# Altium PCB Magnetic-Encoder-V01.PcbDoc
Units mm, origin at the board's own origin, x right, y up, seen from the top; angles counter-clockwise.
Board outline 42.3 x 42.3 mm, 2 copper layers (Top Layer, Bottom Layer); 57 components, 48 nets, 213 pads, 0 vias.
Unrouted connection lines stored in the file: 137.
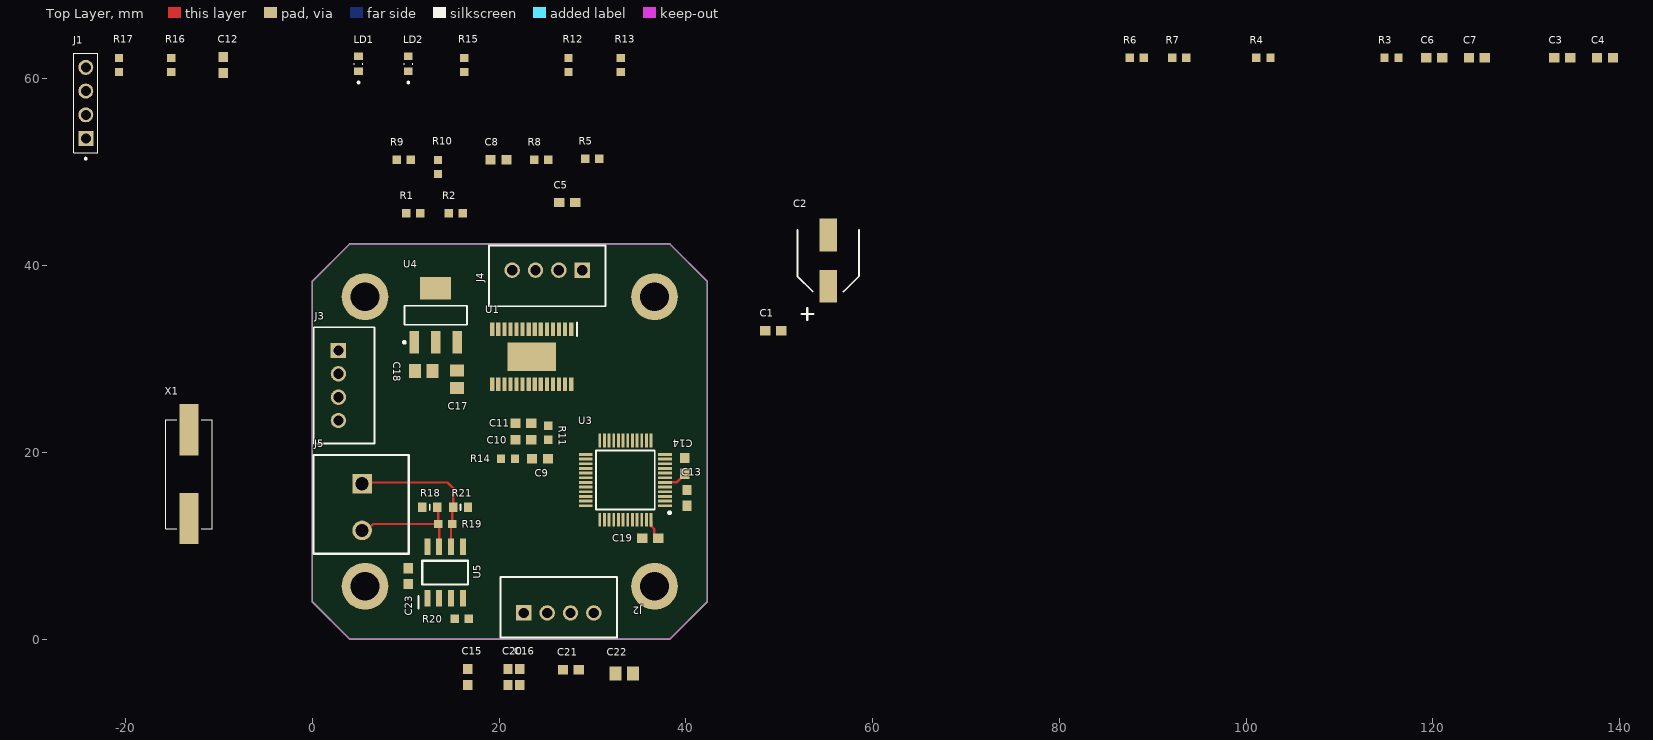
[diagram p0: Top Layer view]
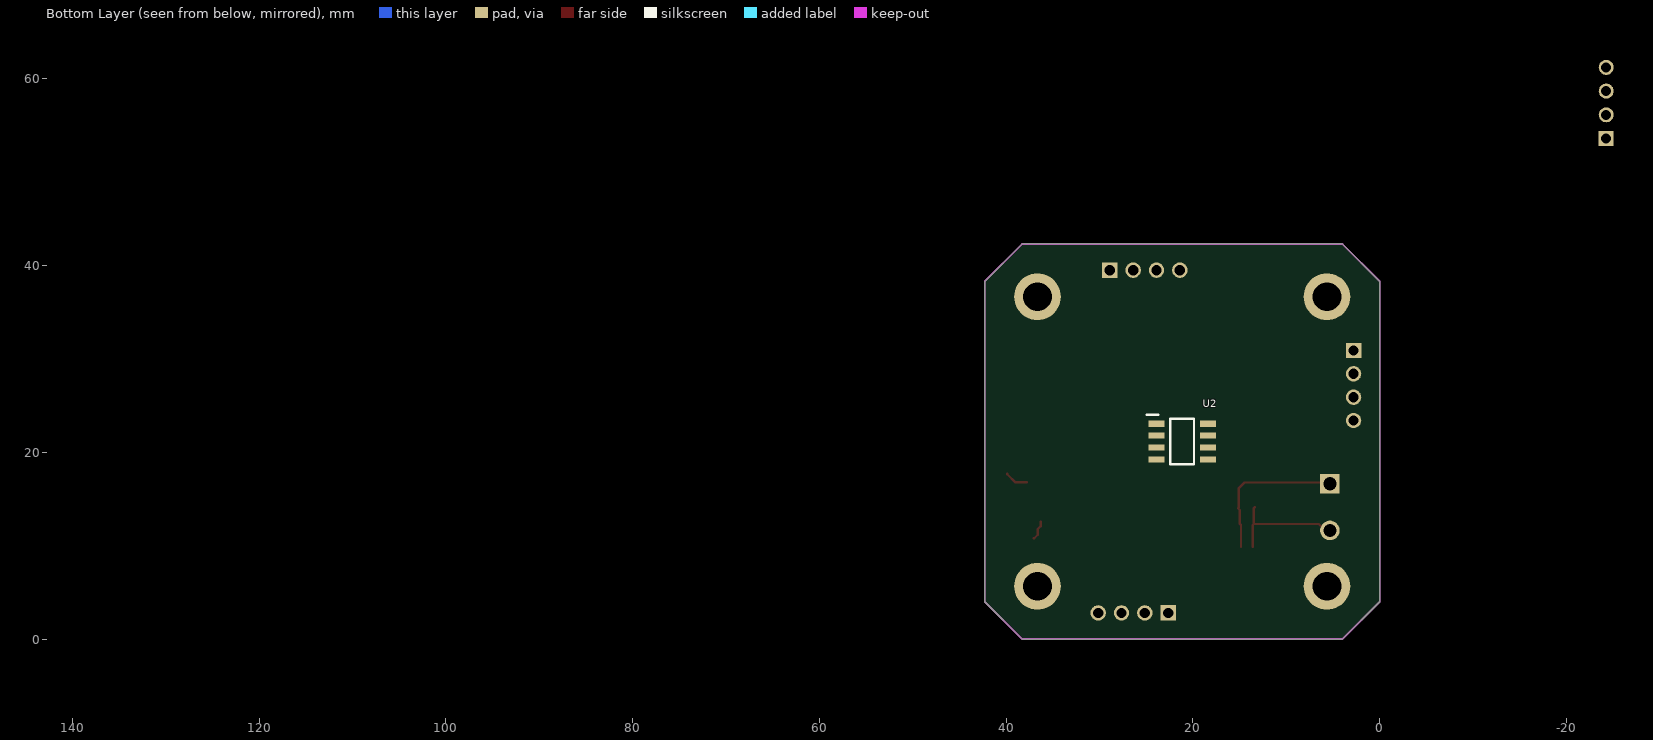
[diagram p1: Bottom Layer view, seen from below]

## Layer stack, top to bottom
Top Solder: solder mask 0.0102, Solder Resist, Dk 3.5
Top Layer: signal copper 0.0356
Dielectric 1: dielectric 0.32, FR-4, Dk 4.8
Bottom Layer: signal copper 0.0356
Bottom Solder: solder mask 0.0102, Solder Resist, Dk 3.5

## Board outline
0,4 0,38.3 4,42.3 38.3,42.3 42.3,38.3 42.3,4 38.3,0 4,0

## Design rules (kind name [scope] priority, off if disabled: settings)
Clearance [All] p1: gap=0.254 ignorepadtopadclearanceinfootprint=TRUE
PolygonConnect [All] p1: connectstyle=Relief reliefconductorwidth=0.254 reliefentries=4 polygonreliefangle="90 Angle" airgapwidth=0.254
RoutingVias [All] p1: holewidth=0.711 width=1.27 viastyle="Through Hole" minholewidth=0.711 minwidth=1.27 maxholewidth=0.711 maxwidth=1.27
SolderMaskExpansion [All] p1: expansion=0.102 istentingtop=FALSE
SupplyNets "Schematic Supply Nets_2" [InNet('GND')] p1: voltage=0.000
SupplyNets "Schematic Supply Nets_1" [InNet('+3.3')] p2: voltage=0.000
SupplyNets "Schematic Supply Nets" [InNet('+VM')] p3: voltage=0.000
Width [All] p1: maxlimit=0.254 minlimit=0.254 preferedwidth=0.254
30 further rules are at their usual default settings.

## Components (designator, comment, footprint, x,y, rotation, side; value= is the part's Value field where it differs from the comment)
C1 "Capacitor" Cap-0603 49.364,33.02 r180 top value=10nF
C2 "Capacitor" MRW-025V101ME077-T/R 55.245,40.513 r90 top value=100uF
C3 "Capacitor" Cap-0603 133.858,62.23 r0 top value=100nF
C4 "Capacitor" Cap-0603 138.43,62.23 r0 top value=100nF
C5 "Capacitor" Cap-0603 27.305,46.736 r0 top value=100nF
C6 "Capacitor" Cap-0603 120.142,62.23 r0 top value=10nF
C7 "Capacitor" Cap-0603 124.714,62.23 r0 top value=10nF
C8 "Capacitor" Cap-0603 19.939,51.308 r0 top value=470nF
C9 "Capacitor" Cap-0603 24.384,19.304 r0 top value=100nF
C10 "Capacitor" Cap-0603 22.606,21.336 r0 top value=1uF
C11 "Capacitor" Cap-0603 22.606,23.114 r0 top value=100nF
C12 "Capacitor" Cap-0603 -9.525,61.468 r90 top value=100nF
C13 "Capacitor" Cap-0603 40.132,15.113 r270 top value=20pF
C14 "Capacitor" Cap-0603 39.878,18.542 r90 top value=20pF
C15 "Capacitor" Cap-0603 16.637,-4.064 r90 top value=10nF
C16 "Capacitor" Cap-0603 22.225,-4.064 r90 top value=1uF
C17 "Capacitor" Cap-0805 15.494,27.813 r270 top value=10uF
C18 "Capacitor" Cap-0805 11.938,28.702 r180 top value=10uF
C19 "Capacitor" Cap-0603 36.195,10.795 r0 top value=100nF
C20 "Capacitor" Cap-0603 20.955,-4.064 r90 top value=100nF
C21 "Capacitor" Cap-0603 27.686,-3.302 r0 top value=100nF
C22 "Capacitor" Cap-0805 33.401,-3.683 r0 top value=4.7uF
C23 "Capacitor" Cap-0603 10.287,6.731 r270 top value=100nF
J1 "Header" Header(M)_4PIN_2.54MM -24.257,57.404 r90 top
J2 "Connector" Connector_4_PIN_2.5MM 26.396,2.794 r0 top
J3 "Connector" Connector_4_PIN_2.5MM 2.8,27.15 r270 top
J4 "Connector" Connector_4_PIN_2.5MM 25.15,39.5 r180 top
J5 "Klemens" DG1285002P14 5.334,16.629 r270 top
LD1 "LED" LED_0603 4.953,61.595 r90 top
LD2 "LED" LED_0603 10.287,61.595 r90 top
R1 "Resistor" RES-0603 10.795,45.593 r0 top value=0R
R2 "Resistor" RES-0603 15.367,45.593 r0 top value=0R
R3 "Resistor" RES-0603 115.57,62.23 r0 top value=10K
R4 "Resistor" RES-0603 101.854,62.23 r0 top value=10K
R5 "Resistor" RES-0603 29.972,51.435 r0 top value=47K
R6 "Resistor" RES-0603 88.265,62.23 r0 top value=10K
R7 "Resistor" RES-0603 92.837,62.23 r0 top value=10K
R8 "Resistor" RES-0603 24.511,51.308 r0 top value=47K
R9 "Resistor" RES-0603 9.779,51.308 r0 top value=0.2R
R10 "Resistor" RES-0603 13.462,50.546 r90 top value=0.2R
R11 "Resistor" RES-0603 25.273,22.098 r270 top value=0R
R12 "Resistor" RES-0603 27.432,61.468 r90 top value=330R
R13 "Resistor" RES-0603 33.02,61.468 r90 top value=330R
R14 "Resistor" RES-0603 20.955,19.304 r180 top value=0R
R15 "Resistor" RES-0603 16.256,61.468 r90 top value=10K
R16 "Resistor" RES-0603 -15.113,61.468 r90 top value=4.7K
R17 "Resistor" RES-0603 -20.701,61.468 r90 top value=4.7K
R18 "Resistor" Resistor_0603 12.573,14.097 r0 top value=1K
R19 "Resistor" RES-0603 14.224,12.319 r0 top value=120R
R20 "Resistor" RES-0603 16.002,2.159 r0 top value=10K
R21 "Resistor" Resistor_0603 15.875,14.097 r0 top value=1K
U1 "Motor Driver" HTSSOP-28 23.495,30.226 r270 top
U2 "Magnetic Encoder" "SOIC 8" 21.15,21.15 r180 bottom locked
U3 "Microcontroller" LQFP-48 33.528,17.018 r180 top
U4 "Voltage Regulator" SOT223-3 13.208,34.671 r0 top
U5 "Transceiver" "SOIC 8" 14.224,7.112 r90 top
X1 "Crystal" HC-49SD -13.208,17.653 r90 top

## Footprints (in the part's own frame and the unit in brackets; to place one, negate y for a bottom-side part, rotate by r counter-clockwise, add the part's x,y. Pads: shape width x height; smd on the part's side, far side on the other; paste and mask are expansions set on the pad)
Cap-0603 [mm]
  rect 1.1x1 smd: 1(-0.85,0) 2(0.85,0)
  body extent -0.8,-0.4 0.8,0.4, height 0.9
Cap-0805 [mm]
  rect 1.3x1.5 smd: 1(-0.95,0) 2(0.95,0)
  body extent -1,-0.62 1,0.63, height 0.78
Connector_4_PIN_2.5MM [mm]
  rect 1.65x1.65 / inner round 1.65 / far side rect 1.65x1.65 hole 1.1: 1(-3.75,0)
  round 1.65 hole 1.1: 2(-1.25,0) 3(1.25,0) 4(3.75,0)
  silkscreen extent -6.23,-2.64 6.23,3.86, body extent -6.23,-2.64 6.23,3.86, height 7.05
DG1285002P14 [mm]
  rect 2.1x2.1 hole 1.4: 1(0,0)
  round 2.1 hole 1.4: 2(5,0)
  silkscreen extent -3.07,-5.2 7.5,5, body extent -3.07,-5.2 7.5,5, height 14.1
HC-49SD [mm]
  rect 5.5x2 smd: 1(-4.75,0) 2(4.75,0)
  silkscreen extent -5.85,-2.5 5.85,2.5, body extent -6.75,-2.5 6.75,2.5, height 4.5
Header(M)_4PIN_2.54MM [mm]
  rect 1.605x1.605 / inner round 1.605 / far side rect 1.605x1.605 hole 1.07: 1(-3.81,0)
  round 1.605 hole 1.07: 2(-1.27,0) 3(1.27,0) 4(3.81,0)
  silkscreen extent -6.06,-1.27 5.33,1.27, body extent -5.08,-1.27 5.08,1.27, height 9.27
HTSSOP-28 [mm]
  rect 1.475x0.45 smd: 1(-2.938,4.225) 2(-2.938,3.575) 3(-2.938,2.925) 4(-2.938,2.275) 5(-2.938,1.625) 6(-2.938,0.975) 7(-2.938,0.325) 8(-2.938,-0.325) 9(-2.938,-0.975) 10(-2.938,-1.625) 11(-2.938,-2.275) 12(-2.938,-2.925) 13(-2.938,-3.575) 14(-2.938,-4.225) 15(2.938,-4.225) 16(2.938,-3.575) 17(2.938,-2.925) 18(2.938,-2.275) 19(2.938,-1.625) 20(2.938,-0.975) 21(2.938,-0.325) 22(2.938,0.325) 23(2.938,0.975) 24(2.938,1.625) 25(2.938,2.275) 26(2.938,2.925) 27(2.938,3.575) 28(2.938,4.225)
  rect 3.1x5.18 smd: 29(0,0)
  silkscreen extent -3.68,4.85 -2.2,4.85, body extent -3.2,-4.85 3.2,4.85, height 1.13
LED_0603 [mm]
  rect 0.81x0.93 smd: 1(0.81,0) 2(-0.81,0)
  silkscreen extent -2.1,-0.45 0.09,0.45, body extent -0.8,-0.4 0.8,0.4, height 0.8
LQFP-48 [mm]
  rect 1.475x0.3 smd: 1(-4.238,2.75) 2(-4.238,2.25) 3(-4.238,1.75) 4(-4.238,1.25) 5(-4.238,0.75) 6(-4.238,0.25) 7(-4.238,-0.25) 8(-4.238,-0.75) 9(-4.238,-1.25) 10(-4.238,-1.75) 11(-4.238,-2.25) 12(-4.238,-2.75) 25(4.238,-2.75) 26(4.238,-2.25) 27(4.238,-1.75) 28(4.238,-1.25) 29(4.238,-0.75) 30(4.238,-0.25) 31(4.238,0.25) 32(4.238,0.75) 33(4.238,1.25) 34(4.238,1.75) 35(4.238,2.25) 36(4.238,2.75)
  rect 0.3x1.475 smd: 13(-2.75,-4.238) 14(-2.25,-4.238) 15(-1.75,-4.238) 16(-1.25,-4.238) 17(-0.75,-4.238) 18(-0.25,-4.238) 19(0.25,-4.238) 20(0.75,-4.238) 21(1.25,-4.238) 22(1.75,-4.238) 23(2.25,-4.238) 24(2.75,-4.238) 37(2.75,4.238) 38(2.25,4.238) 39(1.75,4.238) 40(1.25,4.238) 41(0.75,4.238) 42(0.25,4.238) 43(-0.25,4.238) 44(-0.75,4.238) 45(-1.25,4.238) 46(-1.75,4.238) 47(-2.25,4.238) 48(-2.75,4.238)
  silkscreen extent -4.85,-3.15 3.15,3.62, body extent -4.5,-4.5 4.5,4.5, height 1.6
MRW-025V101ME077-T/R [mm]
  rect 3.5x1.85 smd: 1(-2.75,0) 2(2.75,0)
  silkscreen extent -6.35,-3.3 3.3,3.3, body extent -3.15,-3.15 3.15,3.15, height 7.7
RES-0603 [mm]
  rect 0.9x0.9 smd: 1(-0.75,0) 2(0.75,0)
  body extent -0.85,-0.4 0.85,0.4, height 0.56
Resistor_0603 [mm]
  rect 0.9x1 smd: 1(-0.8,0) 2(0.8,0)
  silkscreen extent 0,-0.31 0,0.31, body extent -0.8,-0.41 0.8,0.41, height 0.55
"SOIC 8" [mm]
  rect 1.75x0.65 smd: 1(-2.76,1.905) 2(-2.76,0.635) 3(-2.76,-0.635) 4(-2.76,-1.905) 5(2.76,-1.905) 6(2.76,-0.635) 7(2.76,0.635) 8(2.76,1.905)
  silkscreen extent -3.81,-2.45 1.27,2.85, body extent -3,-2.45 3,2.45, height 1.7
SOT223-3 [mm]
  rect 1x2.4 smd: 1(-2.3,-2.9) 2(0,-2.9) 3(2.3,-2.9)
  rect 3.3x2.4 smd: 4(0,2.9)
  silkscreen extent -3.47,-3.02 3.35,1.02, body extent -3.25,-3.5 3.25,3.5, height 1.8

## Part data
C1 C6 C7 C15: library part Capacitor_0603, "MLCC (1608) 0603 10nF 50VDC ±10% X7R", Part Number=CC0603KRX7R9BB103, Tolerance=%10, Voltage=50V
  C1 C15: Process=SMD
  C6 C7: Process=NM
C2: library part MRW-025V101ME077-T/R, "CAP.EL.100uF 25V 6.3x7.7 105C 2000Hrs SMD", Tolerance=%20, Voltage=25V, Part Number=MRW-025V101ME077-T/R, Process=SMD
C3 C4 C5 C9 C11 C12 C19 C20 C21 C23: library part Capacitor_0603, "MLCC (1608) 0603 100nF 50VDC ±10% X7R", Part Number=MCF03KTB500104, Tolerance=%10, Voltage=50V
  C3 C4 C5 C11 C12 C19 C20 C21 C23: Process=SMD
  C9: Process=NM
C8: library part Capacitor_0603, "MLCC (1608) 0603 470nF 25VDC ±10% X7R", Part Number=CL10B474KA8NNNC, Tolerance=%10, Voltage=25V, Process=SMD
C10 C16: library part Capacitor_0603, "MLCC (1608) 0603 1uF 25VDC ±10% X7R", Part Number=CL10B105KA8NNNC, Tolerance=%10, Voltage=25V, Process=SMD
C13 C14: library part Capacitor_0603, "MLCC (1608) 0603 20pF 50VDC ±5% C0G (NP0)", Part Number=CC0603JRNPO9BN200, Tolerance=%10, Voltage=50V, Process=SMD
C17 C18: library part Capacitor_0805, "MLCC (2012) 0805 10uF 25VDC ±10% X5R", Part Number=CL21A106KAYNNNE, Tolerance=%10, Voltage=25V, Process=SMD
C22: library part Capacitor_0805, "MLCC (2012) 0805 4.7uF 25VDC ±10% X5R", Part Number=CL21A475KAQNNNE, Tolerance=%10, Voltage=25V, Process=SMD
J1: library part Header(M)_4PIN_2.54MM, "Header 4-Pin Male 2.54mm Pitch", Process=THT
J2 J3 J4: library part 353120460, "Connector Header Through Hole 4 position 0.098\" (2.50mm)", Part Number=353120460, Process=SMD
J5: library part Klemens_2PIN_VIDA, "TERM.BLK.5.00MM 2P PCB TYPE 1 BOY GREEN", Part Number=DG128-5.0-02P-14-00AH, Process=THT
LD1 LD2: library part LED_0603, "LED - Discrete 0603 (1608 Metric)", Color=RED, Forward Voltage=2V, Part Number=LTST-C190KRKT, Process=NM
R1 R2 R11 R14: library part Resistor_0603, "RES.(1608) 0603 0 Ohms 5% 1/10W-S", Part Number=CRT03J7-R0R0, Power=1/10W, Tolerance=%5
  R1 R2 R14: Process=NM
  R11: Process=SMD
R3 R4 R6 R7 R15 R20: library part Resistor_0603, "RES.(1608) 0603 10K Ohms 5% 1/10W AUTOMOTIV", Part Number=CQ03SAJ0103T5E, Power=1/10W, Tolerance=%5
  R3: Process=NM
  R4 R6 R7 R15 R20: Process=SMD
R5 R8: library part Resistor_0603, "RES.(1608) 0603 47K Ohms 5% 1/10W-S", Part Number=0603SAJ0473TDE, Power=1/10W, Tolerance=%5, Process=SMD
R9 R10: library part Resistor_0603, "RES.(1608) 0603 200m Ohms 1% 1/5W", Part Number=CQ03SAJ0103T5E, Power=1/5W, Tolerance=%1, Process=SMD
R12 R13: library part Resistor_0603, "RES.(1608) 0603 330 Ohms 1% 1/10W AEC-Q200", Part Number=CRCW0603330RFKTABC, Power=1/10W, Tolerance=%1, Process=NM
R16 R17: library part Resistor_0603, "RES.(1608) 0603 4.7K Ohms 1% 1/10W", Part Number=CRT03F7E4701, Power=1/10W, Tolerance=%5, Process=SMD
R18 R21: "RES.(1608) 0603 1K Ohms 5% 1/10W 100PPM SMT", Part Number=RC0603JR-071KL, Power=1/10W, Tolerance=%5, Process=SMD
R19: library part Resistor_0603, "RES.(1608) 0603 120 Ohms 1% 1/10W-S 100PPM", Part Number=0603SAF1200T5E, Power=1/10W, Tolerance=%1, Process=SMD
U1: library part DRV8825PWPR, "Bipolar Motor Driver Power MOSFET Logic 28-HTSSOP", Part Number=DRV8825PWPR, Process=SMD
U2: library part AS5600, "Hall Effect Sensor Angle External Magnet, Not Included Gull Wing", Part Number=AS5600, Process=SMD
U3: library part STM32F030C8T6, "32-Bit MCU Cortex-M0 64KB Flash LQFP48 STM32F030C8T6, 32 bit ARM Cortex M0 Microcontroller 48MHz 64 kB Flash, 8 kB RAM, I2C 48-Pin LQFP", Part Number=STM32F030C8T6, Process=SMD
U4: library part AMS1117-3.3, "IC-1117 V.REG. 1A 3V3 SOT223 SMD AMS", Part Number=AMS1117-3.3, Process=SMD
U5: library part MAX3485ED-HTC, "IC-3485 TRANSCEIVER RS-485/RS-422 SOP-8", Part Number=MAX3485ED-HTC, Process=SMD
X1: library part Crystal_SMD_2, "CRYSTAL 8MHz HC49SMT 20pF SMD TR RALTRON", Capacitance=20pF, Frequency=8MHz, Part Number=AS-8.000-20-SMD-TR, Process=SMD

## Free pads (board coordinates)
  round 5 hole 3.1: 1(5.65,5.65) 2(5.65,36.65) 3(36.65,36.65) 4(36.65,5.65)

## Nets (pads, with @x,y where several pads share a name; then routed paths per layer and width w, separated by ;. In a path a pad name is that pad's centre, name@x,y a point inside that pad or via, vN(x,y) a via of type N, cw(c..) or ccw(c..) an arc to the next point about the centre after c; other vN are vias at no path point)
3V3_OUT: C8.1 R5.2 U1.15
+3.3: C10.2 C15.2 C16.2 C18.1 C19.2 C20.2 C21.2 C22.1 C23.1 J1.1 J2.1 J3.1 R1.1 R3.2 R6.1 R7.1 R11.2 R15.2 R16.2 R17.2 R21.2 U2.2 U3.1 U3.9 U3.24 U3.48 U4.2 U4.4 U5.8 | length 2.1
  Top Layer w0.254: U3.48@36.309,12.573 36.309,12.078 36.622,11.765 36.622,11.168 36.995,10.795 C19.2
+VM: C2.1 C3.1 C4.1 C5.1 C17.1 U1.4 U1.11 U4.3
AOUT1: J4.1 U1.5
AOUT2: J4.2 U1.7
AS5600_DIR: U2.8 U3.25
AS5600_OUT: C9.2 U2.3 U3.26
BOOT0: R3.1 R4.2 U3.44
BOUT1: J4.3 U1.10
BOUT2: J4.4 U1.8
DIR: C6.1 U1.20 U3.43
ENABLE: U1.21 U3.16
FAULT: R7.2 U1.18 U3.19
GND: C2.2 C3.2 C4.2 C6.2 C7.1 C8.2 C9.1 C10.1 C11.1 C12.2 C13.2 C14.2 C15.1 C16.1 C17.2 C18.2 C19.1 C20.1 C21.1 C22.2 C23.2 J1.4 J2.4 J3.4 LD1.2 LD2.2 R2.2 R4.1 R8.2 R9.1 R10.1 R14.1 R18.1 R20.2 U1.14 U1.28 U1.29 U2.4 U3.8 U3.23 U3.47 U4.1 U5.5
HOME: R6.2 U3.20
I2C_SCL: J3.2 R17.1 U2.7 U3.21
I2C_SDA: J3.3 R16.1 U2.6 U3.22
LED1: R13.2 U3.27
LED2: R12.2 U3.28
MAX_CTRL: R20.1 U3.12 U5.2 U5.3
MCU_NRST: C12.1 R15.1 U3.7
MODE1: U1.26 U3.13
MODE2: U1.25 U3.14
MODE3: U1.24 U3.15
NetC1_1: C1.1 U1.1
NetC1_2: C1.2 U1.2
NetC5_2: C5.2 U1.3
NetC11_2: C11.2 R11.1 U2.1
NetC13_1: C13.1 U3.5 X1.1
NetC14_1: C14.1 U3.6 X1.2 | length 2.5
  Top Layer w0.254: U3.6 39.004,16.768 39.878,17.642 C14.1
NetJ5_1: J5.1 R19.2 R21.1 U5.6 | length 16.4
  Top Layer w0.254: J5.1 5.469,16.764 14.478,16.764 15.075,16.167 R21.1 ; U5.6 14.859,12.204 R19.2 14.974,13.793 R21.1@15.176,13.995
NetJ5_2: J5.2 R18.2 R19.1 U5.7 | length 12.7
  Top Layer w0.254: J5.2 5.834,11.629 6.524,12.319 R19.1 ; R18.2 13.474,13.996 R19.1 ; U5.7 13.589,12.204 R19.1
NetLD1_1: LD1.1 R12.1
NetLD2_1: LD2.1 R13.1
NetR1_2: R1.2 R2.1 U1.19
NetR5_1: R5.1 R8.1 U1.12 U1.13
NetR9_2: R9.2 U1.9
NetR10_2: R10.2 U1.6
NetR14_2: R14.2 U2.5
RESET: U1.16 U3.17
SLEEP: U1.17 U3.18
STEP: C7.2 U1.22 U3.42
SWCLK: J1.3 U3.37
SWDIO: J1.2 U3.34
USART1_RX: J2.3 U3.31
USART1_TX: J2.2 U3.30
USART4_RX: U3.11 U5.1
USART4_TX: U3.10 U5.4
pads on no net: U1.23 U1.27 U3.2 U3.3 U3.4 U3.29 U3.32 U3.33 U3.35 U3.36 U3.38 U3.39 U3.40 U3.41 U3.45 U3.46

## Keep-outs
Keep-Out Layer:
  the board outline again, w0.2